# Altium PCB npt_client_wifi_board.PcbDoc
Units mm, origin at the board's own origin, x right, y up, seen from the top; angles counter-clockwise.
Board outline 40.08 x 63.42 mm, 2 copper layers (Top Layer, Bottom Layer); 30 components, 21 nets, 74 pads, 8 vias.
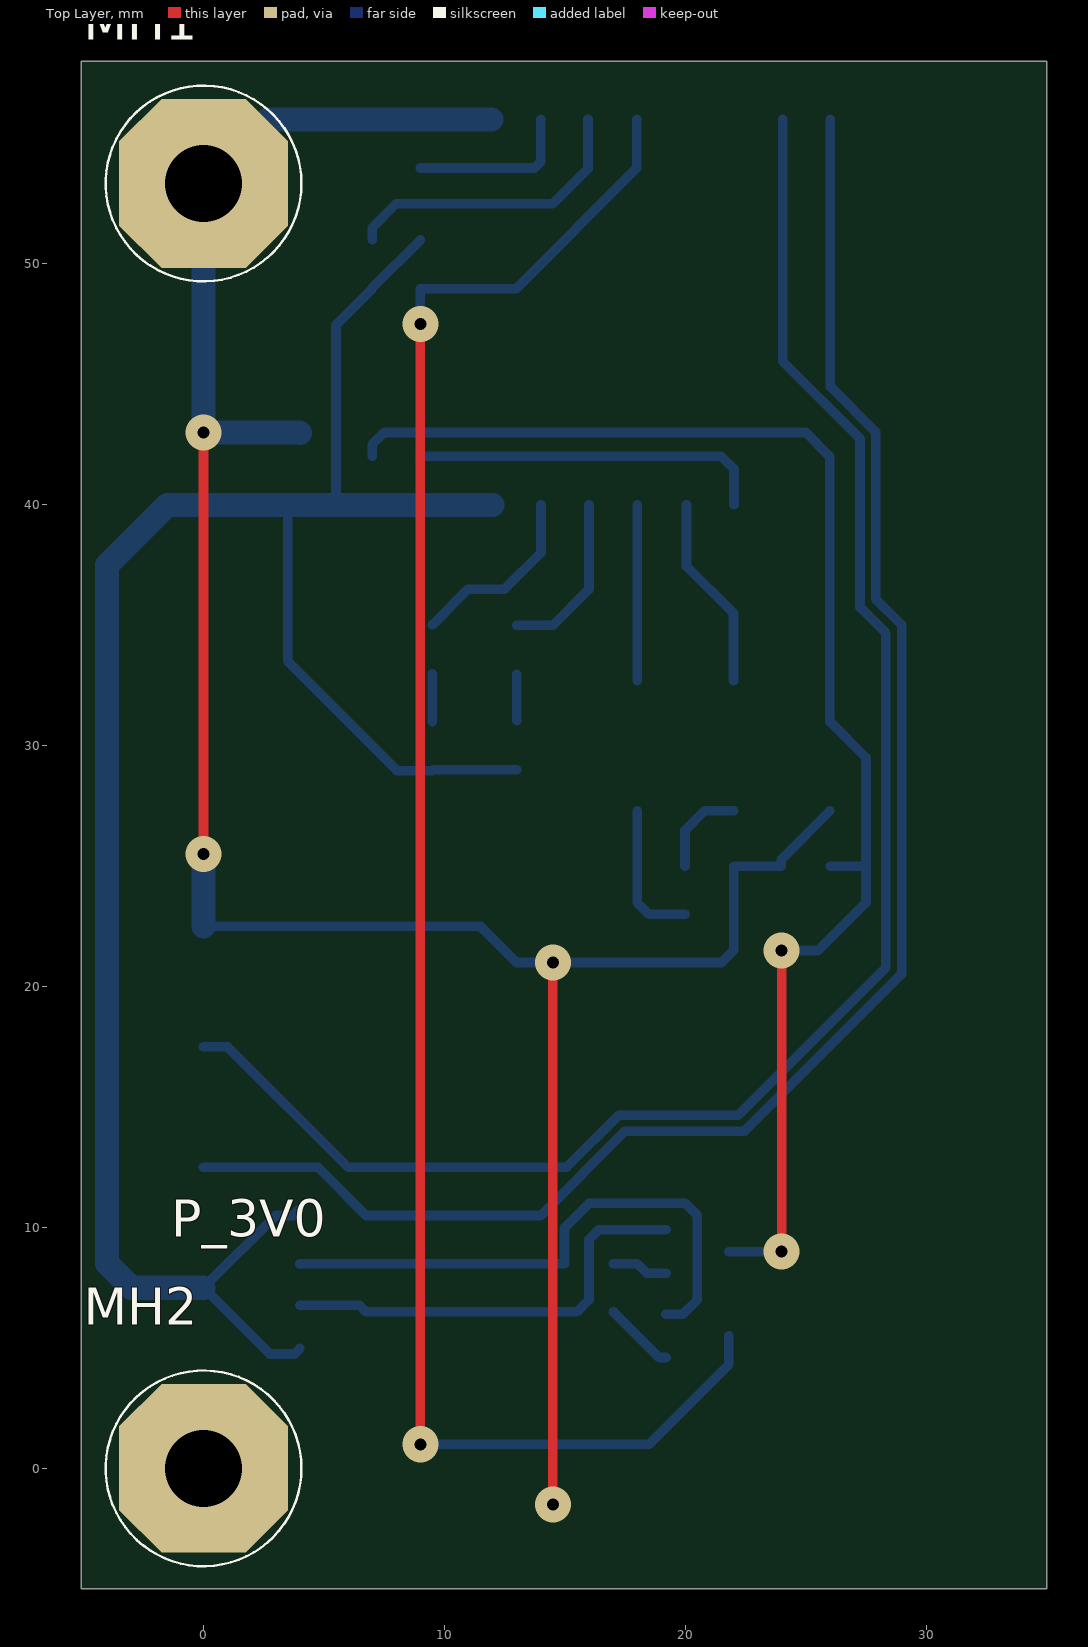
[diagram p0: Top Layer view]
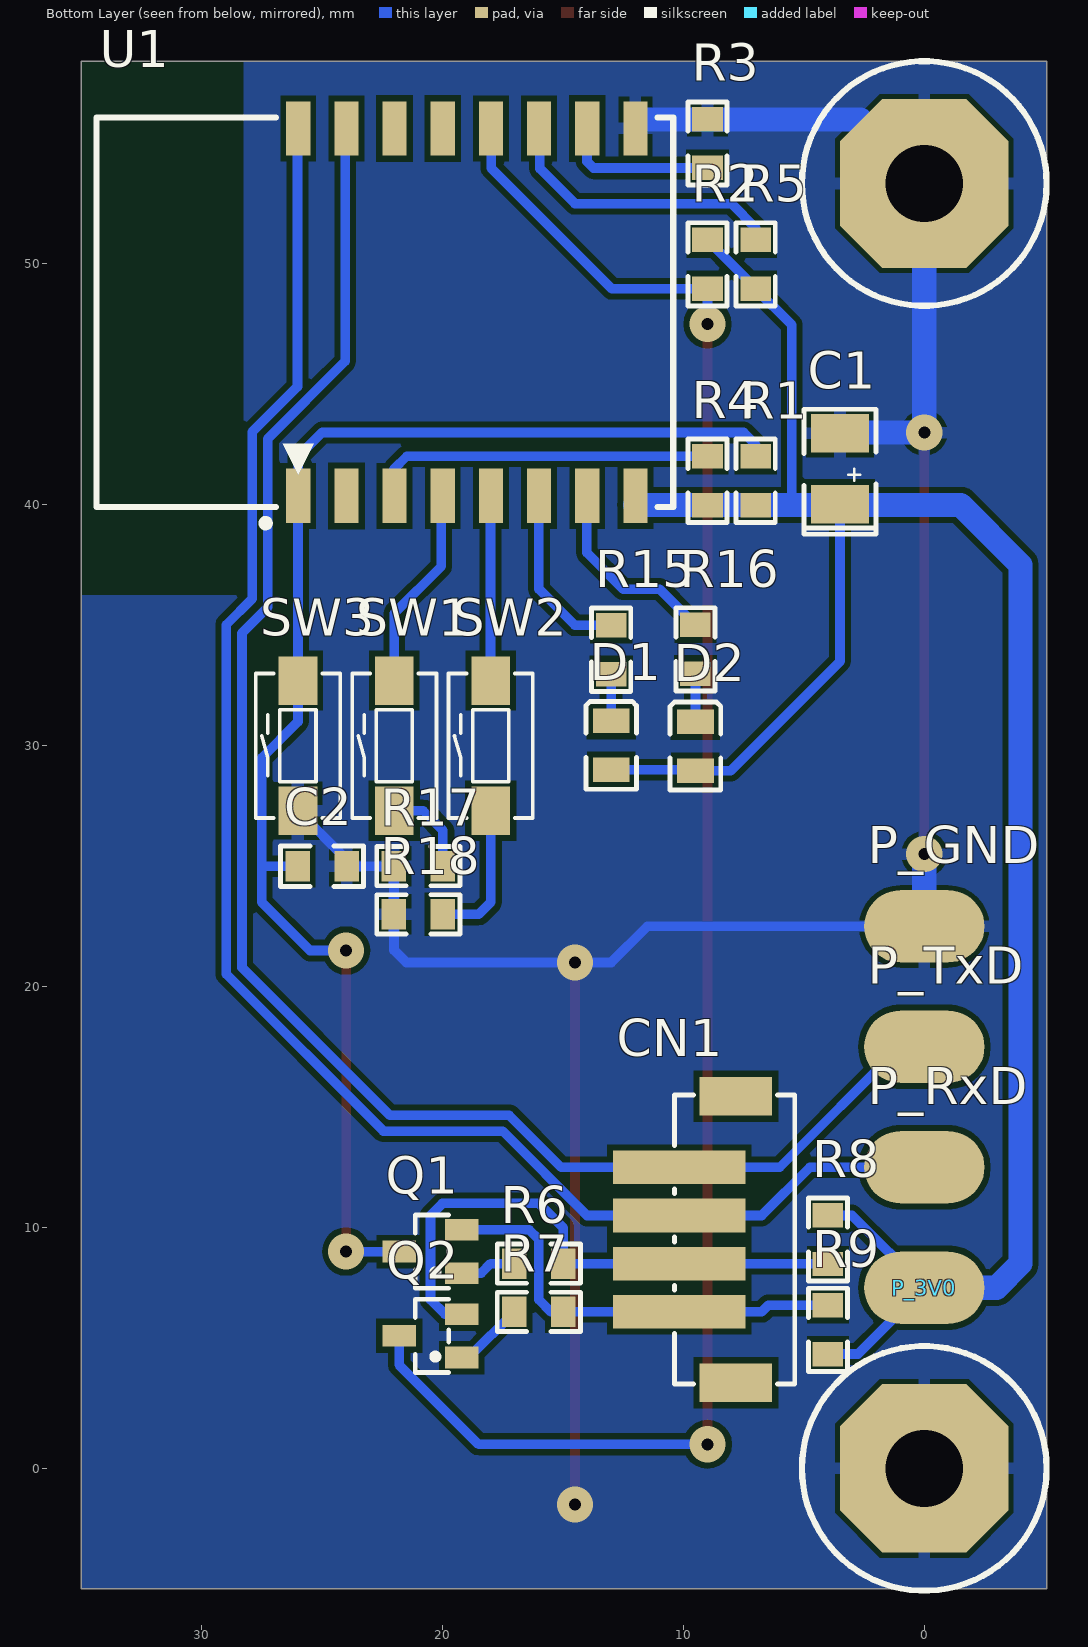
[diagram p1: Bottom Layer view, seen from below]
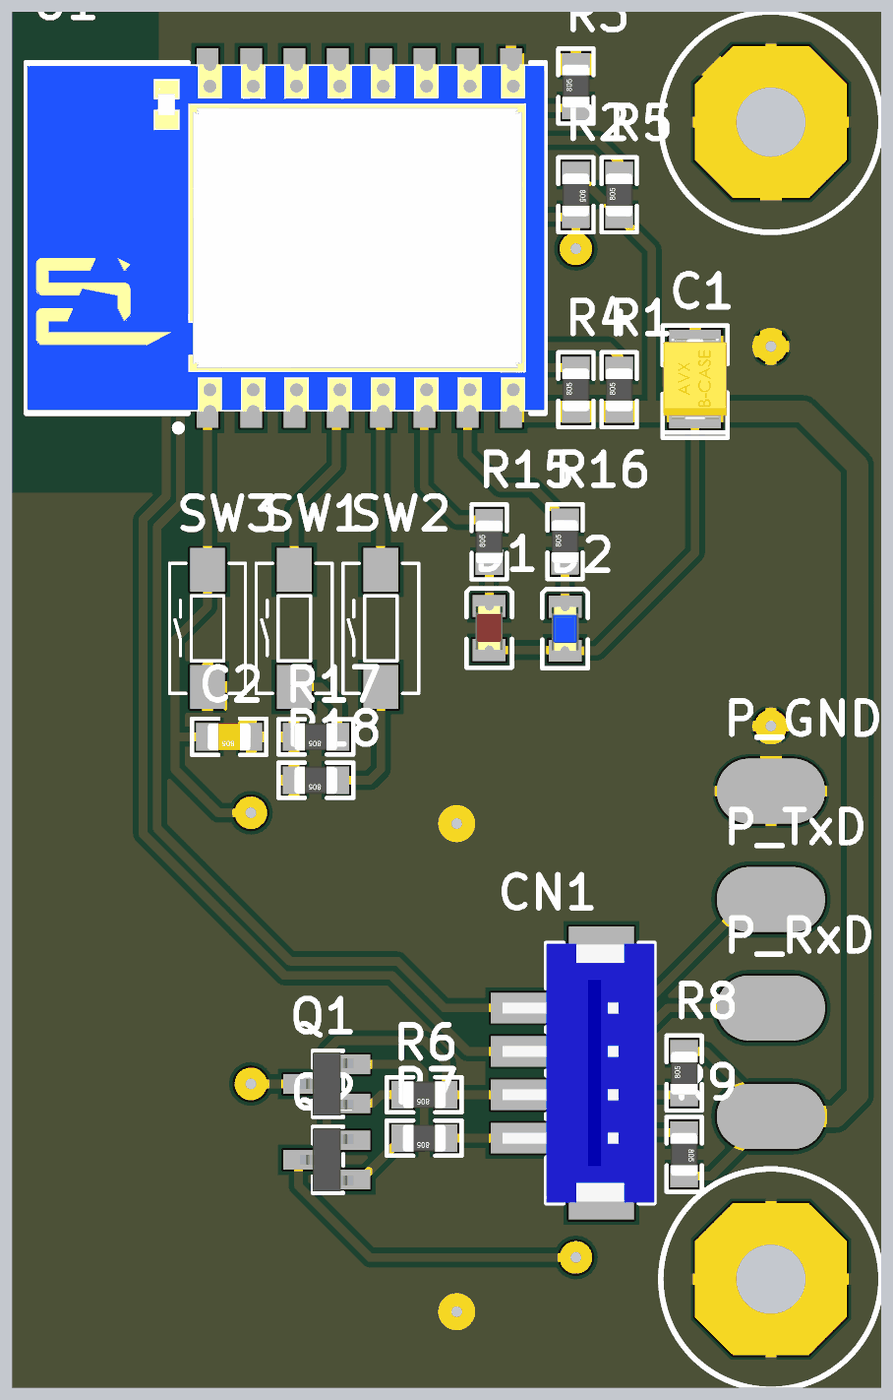
[diagram p2: 3D render of the assembled board from below, using the file's embedded part models]

## Layer stack, top to bottom
Top Solder: solder mask 0.0102, Solder Resist, Dk 3.5
Top Layer: signal copper 0.0356
Dielectric 1: dielectric 0.32, FR-4, Dk 4.8
Bottom Layer: signal copper 0.0356
Bottom Solder: solder mask 0.0102, Solder Resist, Dk 3.5

## Board outline
-5.08,-5 -5.08,58.42 35,58.42 35,-5

## Design rules (kind name [scope] priority, off if disabled: settings)
Clearance [All] p1: gap=0.254
PolygonConnect [All] p1: connectstyle=Relief reliefconductorwidth=0.5 reliefentries=4 polygonreliefangle="90 Angle" airgapwidth=0.2
RoomDefinition npt_client_wifi_board [InComponentClass('npt_client_wifi_board')] p1: confinementstyle=ConfineIn formatcopy=TRUE lockcomponents=FALSE outline -28.575,-19.685 174.625,-19.685 174.625,85.725 -28.575,85.725
RoutingVias [All] p1: holewidth=0.5 width=1.5 viastyle="Through Hole" minholewidth=0.5 minwidth=1.5 maxholewidth=0.5 maxwidth=1.5
SolderMaskExpansion [All] p1: expansion=0.102
Width [All] p1: maxlimit=1 minlimit=0.3 preferedwidth=0.4
30 further rules are at their usual default settings.

## Components (designator, comment, footprint, x,y, rotation, side; value= is the part's Value field where it differs from the comment)
C1 "100uF/6V3" SMDB 3.5,41.5 r270 bottom
C2 "470p" C0805 25,25 r0 bottom
CN1 "B4B-PH-SM4-TB" B4B-PH-SM4-TB 9,9.5 r270 bottom
D1 "RED" LED0805R 13,30.016 r90 bottom
D2 "BLUE" LED0805B 9.5,29.984 r90 bottom
MH1 "MHOLE 3mm" "3mm screw drill I" 0,53.34 r0 top
MH2 "MHOLE 3mm" "3mm screw drill I" 0,0 r0 top
P_3V0 "CablePAD" PADSMD2x3mm#1 0,7.5 r180 top
P_GND "CablePAD" PADSMD2x3mm#2 0,22.5 r180 bottom
P_RxD "CablePAD" PADSMD2x3mm#2 0,12.5 r180 bottom
P_TxD "CablePAD" PADSMD2x3mm#2 0,17.5 r180 bottom
Q1 "BC847A" SOT-23 20.5,9 r90 bottom
Q2 "BC847A" SOT-23 20.5,5.5 r90 bottom
R1 "12k" R0805 7,41 r90 bottom
R2 "12k" R0805 9,49.984 r270 bottom
R3 "12k" R0805 9,55 r90 bottom
R4 "12k" R0805 9,41 r90 bottom
R5 "12k" R0805 7,49.984 r90 bottom
R6 "12k" R0805 16,8.5 r0 bottom
R7 "12k" R0805 16,6.5 r0 bottom
R8 "12k" R0805 4,9.5 r90 bottom
R9 "12k" R0805 4,5.75 r270 bottom
R15 "470" R0805 13,33.984 r90 bottom
R16 "470" R0805 9.5,34 r90 bottom
R17 "470" R0805 21,25 r0 bottom
R18 "470" R0805 21,23 r0 bottom
SW1 "DTSM31N" DTSM-3 22,30 r90 bottom
SW2 "DTSM31N" DTSM-3 18,30 r90 bottom
SW3 "DTSM31N" DTSM-3 26,30 r90 bottom
U1 "ESP-12" ESP-12 25.99,40 r90 bottom

## Footprints (in the part's own frame and the unit in brackets; to place one, negate y for a bottom-side part, rotate by r counter-clockwise, add the part's x,y. Pads: shape width x height; smd on the part's side, far side on the other; paste and mask are expansions set on the pad)
"3mm screw drill I" [mm]
  oct 7x7 hole 3.2: 1(0,0)
  silkscreen extent -4.06,-4.06 4.06,4.06
B4B-PH-SM4-TB [mm]
  rect 1.6x3 smd: 0(-5.95,1.175) 0(5.95,1.175)
  rect 1.4x5.5 smd: 1(-3,-1.175) 2(-1,-1.175) 3(1,-1.175) 4(3,-1.175)
  silkscreen extent -6,-1.37 6,3.63, body extent -5.98,-3.38 5.97,3.62, height 6.6
C0805 [mil]
  rect 40x50 smd: 1(-40,0) 2(40,0)
  silkscreen extent -68,-33 68,33, body extent -39,-25 39,25, height 31
DTSM-3 [mm]
  rect 2x1.6 smd: 1(-2.7,0) 2(2.7,0)
  silkscreen extent -3,-1.75 3,1.75, body extent -3.6,-1.75 3.6,1.75, height 5
ESP-12 [mm]
  rect 2.25x1 smd: 1(0.375,0) 2(0.375,-2) 3(0.375,-4) 4(0.375,-6) 5(0.375,-8) 6(0.375,-10) 7(0.375,-12) 8(0.375,-14) 9(15.625,-14) 10(15.625,-12) 11(15.625,-10) 12(15.625,-8) 13(15.625,-6) 14(15.625,-4) 15(15.625,-2) 16(15.625,0)
  silkscreen extent -0.91,-15.57 16.08,8.37, body extent 0,-15.6 16,8.4, height 2.5
LED0805B [mil]
  rect 40x60 smd: 1(-40,0) 2(40,0)
  silkscreen extent -72,-41 72,41, body extent -40,-25 40,25, height 43
LED0805R [mil]
  rect 40x60 smd: 1(-40,0) 2(40,0)
  silkscreen extent -72,-41 72,41, body extent -40,-25 40,25, height 43
PADSMD2x3mm#1 [mm]
  oval 5x3 smd far side: 0(0,0)
PADSMD2x3mm#2 [mm]
  oval 5x3 smd: 0(0,0)
R0805 [mil]
  rect 40x50 smd: 1(-40,0) 2(40,0)
  silkscreen extent -68,-32 68,32, body extent -39,-25 39,25, height 31
SMDB [mm] "SMDB"
  rect 1.6x2.4 smd: 1(1.476,0) 2(-1.475,0)
  silkscreen extent -2.46,-1.5 2.72,1.5, body extent -1.85,-1.46 1.85,1.47, height 2.03
SOT-23 [mm]
  rect 0.9x1.4 smd: 1(-0.9,-1.3) 2(0.9,-1.3) 3(0,1.3)
  silkscreen extent -1.52,-0.76 1.52,0.64, body extent -1.46,-1.25 1.46,1.23, height 1

## Part data
C1: library part "Cap Pol Tant", "Polarized Tantalum Capacitor"
C2: library part Cap, "Capacitor"
D1: library part LED_RED, "RED LED"
D2: library part LED_BLUE, "BLUE LED"
MH1 MH2: library part MHOLE_3MM, "3mm Mounting Hole"
P_3V0 P_GND P_RxD P_TxD: "Cable PAD"
Q1 Q2: "NPN General Purpose Transistor (VCE=45V, IC=100mA, HFE=110-220)"
R1 R2 R3 R4 R5 R6 R7 R8 R9 R15 R16 R17 R18: library part Res, "Resistor"
SW1 SW2 SW3: "DIPTRONICS 6x3,5mm SMD Tactile SPST-NO Switch"
U1: "ESP-12 Wi-Fi Module by AI-Thinker"

## Via types
v1: diameter 1.5, hole 0.5, Top Layer to Bottom Layer, 8 vias

## Nets (pads, with @x,y where several pads share a name; then routed paths per layer and width w, separated by ;. In a path a pad name is that pad's centre, name@x,y a point inside that pad or via, vN(x,y) a via of type N, cw(c..) or ccw(c..) an arc to the next point about the centre after c; other vN are vias at no path point)
3V0: C1.1 D1.1 D2.1 P_3V0.0 R1.1 R2.1 R4.1 R5.1 R8.2 R9.2 U1.8 | length 91.4
  Bottom Layer w0.4: C1.1@3.5,40 3.5,33.5 8.032,28.968 D2.1 9.532,29 D1.1 ; R9.2@4,4.984 3.766,4.75 2.75,4.75 P_3V0.0 3,10.5 3.718,10.5 R8.2@4,10.782 ; 5.5,40 5.5,47.468 R5.1 7,49 R2.1
  Bottom Layer w1: P_3V0.0 -3,7.5 -4,8.5 -4,37.5 -1.5,40 3.5,40 5.5,40 U1.8@12,40
DTR: CN1.3 Q2.2 R6.1 R8.1 | length 23.7
  Bottom Layer w0.4: R8.1 4.016,8.5 CN1.3 R6.1 14.984,9.984 16,11 20,11 20.5,10.5 20.5,7 19.9,6.4 Q2.2
EN: R4.2 U1.3 | length 14.7
  Bottom Layer w0.4: R4.2 21.484,42.016 22.02,41.48 U1.3@22.02,40
GND: C1.2 C2.1 MH1.1 MH2.1 P_GND.0 R3.2 R17.2 R18.2 SW3.1 U1.9 | length 101.9
  Top Layer w0.4: v1(0,25.5) v1(0,43) ; v1(14.5,-1.5) v1(14.5,21)
  Bottom Layer w0.4: P_GND.0 11.5,22.5 13,21 v1(14.5,21) 21.5,21 22.016,21.516 R18.2 R17.2 C2.1 23.984,25.284 SW3.1
  Bottom Layer w1: P_GND.0 v1(0,25.5) ; C1.2@4,42.975 3.975,43 v1(0,43) MH1.1 2.66,56 U1.9@11.96,56
GPIO0: Q2.3 R2.2 U1.12 | length 76.4
  Top Layer w0.4: v1(9,1) v1(9,47.5)
  Bottom Layer w0.4: v1(9,1) 18.5,1 21.8,4.3 Q2.3 ; v1(9,47.5) R2.2 12.968,48.968 17.98,53.98 U1.12@17.98,56
GPIO2: R5.2 U1.11 | length 12.5
  Bottom Layer w0.4: R5.2 7,51.5 8,52.5 14.5,52.5 15.96,53.96 U1.11@15.96,56
GPIO15: R3.1 U1.10 | length 6.9
  Bottom Layer w0.4: R3.1 13.734,53.984 14,54.25 U1.10@14,56
NetD1_2: D1.2 R15.1 | length 1.9
  Bottom Layer w0.4: D1.2 R15.1
NetD2_2: D2.2 R16.1 | length 2
  Bottom Layer w0.4: D2.2 R16.1
NetQ1_1: Q1.1 R6.2 | length 2.3
  Bottom Layer w0.4: R6.2 18,8.5 18.4,8.1 Q1.1
NetQ2_1: Q2.1 R7.2 | length 3
  Bottom Layer w0.4: R7.2 18.916,4.6 Q2.1
NetR15_2: R15.2 U1.6 | length 7.1
  Bottom Layer w0.4: R15.2 14.5,35 16,36.5 U1.6@16,40
NetR16_2: R16.2 U1.7 | length 7.7
  Bottom Layer w0.4: R16.2 10.984,36.5 12.5,36.5 14.01,38.01 U1.7@14.01,40
NetR17_1: R17.1 SW1.1 | length 3.8
  Bottom Layer w0.4: R17.1 19.984,26.484 20.8,27.3 SW1.1
NetR18_1: R18.1 SW2.1 | length 6
  Bottom Layer w0.4: SW2.1 18,23.5 18.5,23 R18.1
NetSW1_2: SW1.2 U1.4 | length 8.1
  Bottom Layer w0.4: U1.4@20.05,40 20.05,37.45 22,35.5 SW1.2
NetSW2_2: SW2.2 U1.5 | length 7.3
  Bottom Layer w0.4: SW2.2 18.01,32.71 U1.5@18.01,40
NRST: C2.2 Q1.3 R1.2 SW3.2 U1.1 | length 59.7
  Top Layer w0.4: v1(24,9) v1(24,21.5)
  Bottom Layer w0.4: R1.2 7,42.5 7.5,43 25,43 25.99,42.01 U1.1 25.99,40 26,39.99 SW3.2 26,31 27.5,29.5 27.5,25 ; Q1.3 v1(24,9) ; v1(24,21.5) 25.5,21.5 27.5,23.5 27.5,25 ; C2.2 27.5,25
RTS: CN1.4 Q1.2 R7.1 R9.1 | length 18.2
  Bottom Layer w0.4: R9.1 6.484,6.766 6.75,6.5 CN1.4 15.5,6.5 16,7 16,9.5 16.4,9.9 Q1.2
RXD0: CN1.1 P_TxD.0 U1.15 | length 70.8
  Bottom Layer w0.4: P_TxD.0 1,17.5 6,12.5 CN1.1 15.075,12.5 17.229,14.654 22.185,14.654 28.324,20.793 28.324,34.676 27.25,35.75 27.25,42.75 24.04,45.96 U1.15@24.04,56
TXD0: CN1.2 P_RxD.0 U1.16 | length 70.7
  Bottom Layer w0.4: P_RxD.0 4.75,12.5 6.75,10.5 CN1.2 14,10.5 17.5,14 22.456,14 28.978,20.522 28.978,35.022 27.904,36.096 27.904,43.021 26.02,44.905 U1.16@26.02,56
pads on no net: CN1.0 U1.2 U1.13 U1.14

## Polygon pours and split planes (outlines as drawn)
GND on Bottom Layer "Bottom Layer-GND" (solid, remove dead copper, pour order 0): -5.08,-5 -5.08,58.42 35,58.42 35,-5

## Other copper
Bottom Layer:
  pour cut-out: 28.242,58.42 28.25,58.412 28.25,36.25 34.962,36.25 35,36.288 35,58.5

## Silkscreen, mask and mechanical layers (free items; w line width, h text height)
Mechanical 3:
  the board outline again, w0.3

## Text inside footprints (layer, text, board x,y; h text height)
U1: Mechanical 13 "ANTENNA AREA" at 33.864,40.127 h0.25 r270; Mechanical 13 "CUTOUT POLYGON" at 33.356,40.127 h0.25 r270